# Altium PCB JTAG_Adapter.PcbDoc
Units mm, origin at the board's own origin, x right, y up, seen from the top; angles counter-clockwise.
Board outline 23.45 x 20.3 mm, 2 copper layers (Top Layer, Bottom Layer), stack 1.536 mm thick; 2 components, 7 nets, 20 pads, 0 vias.
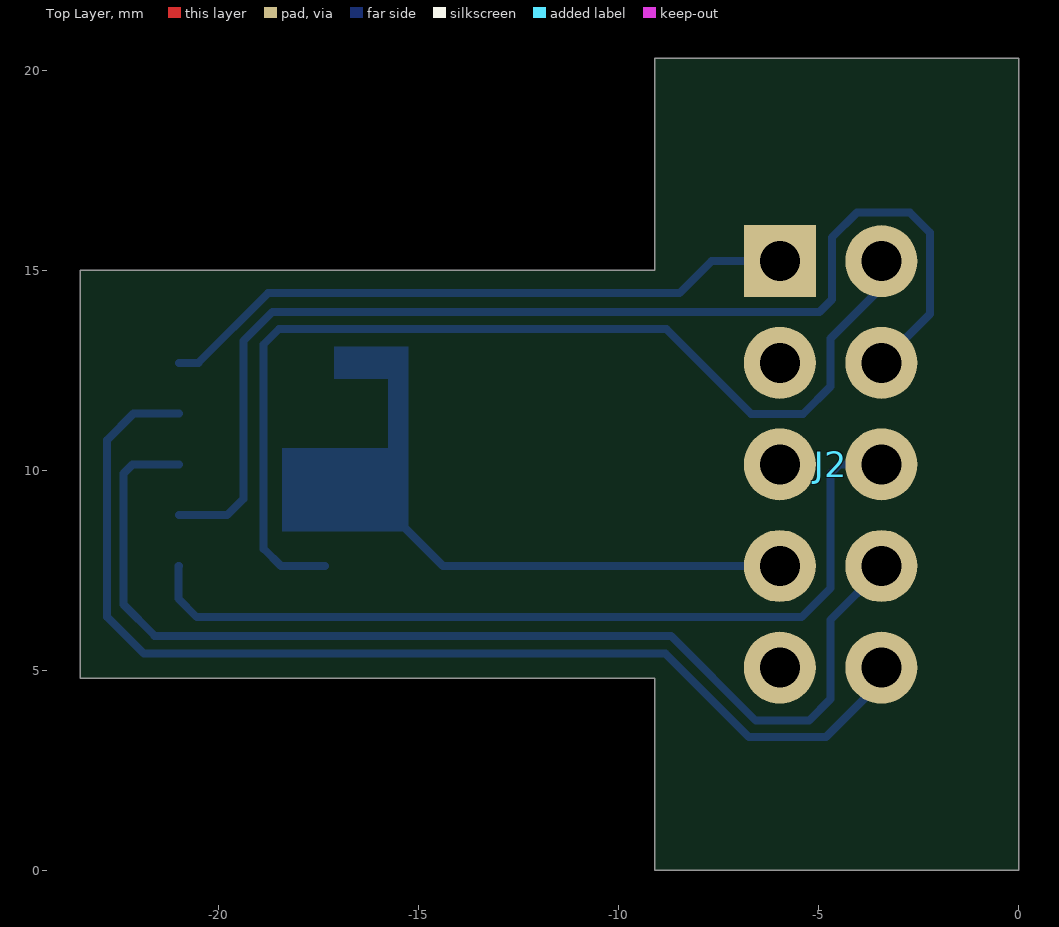
[diagram p0: Top Layer view]
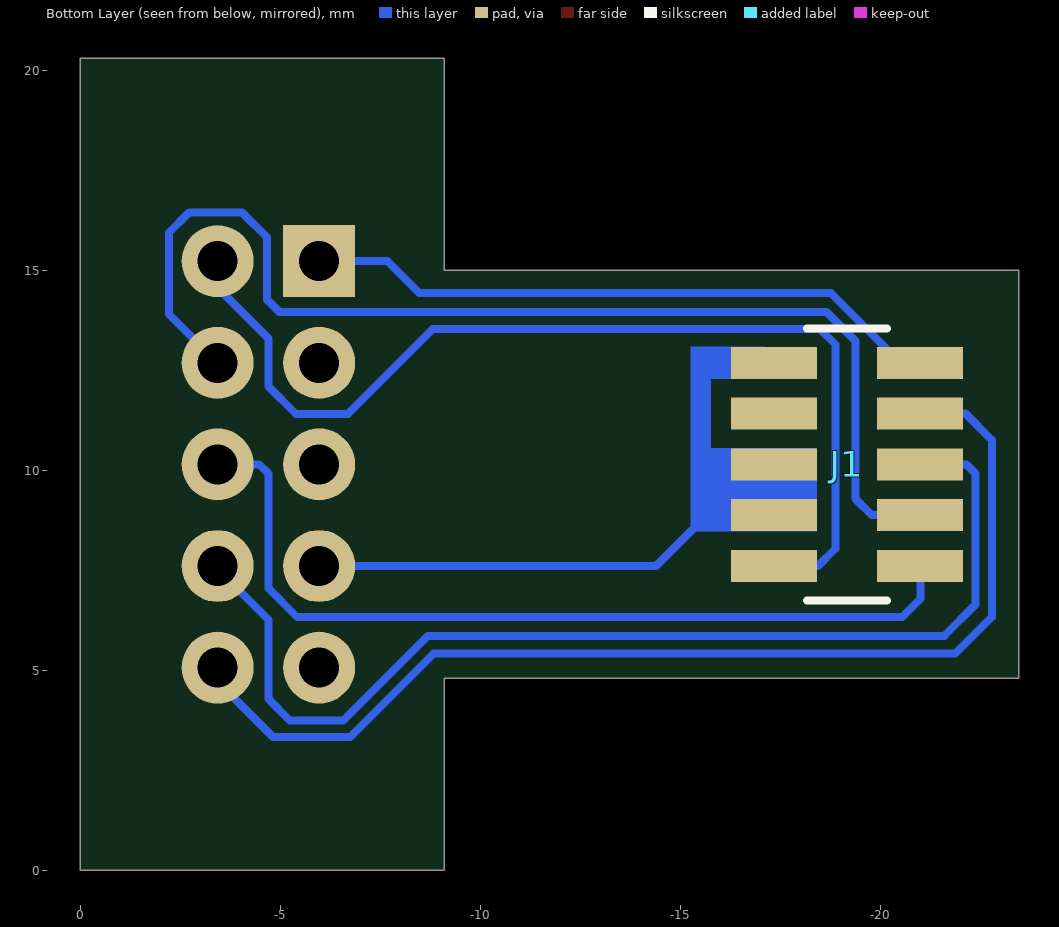
[diagram p1: Bottom Layer view, seen from below]

## Layer stack, top to bottom
Top Solder: solder mask 0.0102, Solder Resist, Dk 3.5
Top Layer: signal copper 0.018
Dielectric 1: dielectric 1.5, FR-4, Dk 4.8
Bottom Layer: signal copper 0.018
Bottom Solder: solder mask 0.0102, Solder Resist, Dk 3.5

## Board outline
-9.101,0 0,0 0,20.3 -9.101,20.3 -9.101,15.009 -23.454,15.009 -23.454,4.807 -9.101,4.807 -9.101,4.282

## Design rules (kind name [scope] priority, off if disabled: settings)
Clearance [All] p1: gap=0.2 ignorepadtopadclearanceinfootprint=FALSE
PolygonConnect [All] p1: connectstyle=Relief reliefconductorwidth=0.254 reliefentries=4 polygonreliefangle="90 Angle" airgapwidth=0.254
RoutingVias [All] p1: holewidth=1 width=1.8 viastyle="Through Hole" minholewidth=1 minwidth=1.8 maxholewidth=1 maxwidth=1.8
SolderMaskExpansion [All] p1: expansion=0.102
Width [All] p1: maxlimit=0.2 minlimit=0.2 preferedwidth=0.2
30 further rules are at their usual default settings.

## Components (designator, comment, footprint, x,y, rotation, side; value= is the part's Value field where it differs from the comment)
J1 "DS1065-05-2x5S8BS" DS1065-05-2x5S8BS -19.159,10.15 r90 bottom locked
J2 "BH-10" IDC-10-2.54 -4.7,10.15 r0 top

## Footprints (in the part's own frame and the unit in brackets; to place one, negate y for a bottom-side part, rotate by r counter-clockwise, add the part's x,y. Pads: shape width x height; smd on the part's side, far side on the other; paste and mask are expansions set on the pad)
DS1065-05-2x5S8BS [mm]
  rect 0.8x2.15 smd: 1(-2.54,-1.825) 2(-2.54,1.825) 3(-1.27,-1.825) 4(-1.27,1.825) 5(0,-1.825) 6(0,1.825) 7(1.27,-1.825) 8(1.27,1.825) 9(2.54,-1.825) 10(2.54,1.825)
  silkscreen extent -3.4,-1 3.4,1, body extent -3.35,-2.4 3.35,2.4, height 4.55
IDC-10-2.54 [mm]
  rect 1.8x1.8 hole 1: 1(-1.27,5.08)
  round 1.8 hole 1: 2(1.27,5.08) 3(-1.27,2.54) 4(1.27,2.54) 5(-1.27,0) 6(1.27,0) 7(-1.27,-2.54) 8(1.27,-2.54) 9(-1.27,-5.08) 10(1.27,-5.08)
  body extent -4.4,-10.15 4.7,10.15, height 9.3

## Part data
J1: System=Connector

## Nets (pads, with @x,y where several pads share a name; then routed paths per layer and width w, separated by ;. In a path a pad name is that pad's centre, name@x,y a point inside that pad or via, vN(x,y) a via of type N, cw(c..) or ccw(c..) an arc to the next point about the centre after c; other vN are vias at no path point)
DVDD: J1.2 J2.2 | length 26
  Bottom Layer w0.2: J1.2 -18.441,7.61 -18.872,8.041 -18.872,13.152 -18.493,13.531 -8.804,13.531 -6.688,11.415 -5.384,11.415 -4.701,12.098 -4.701,13.299 -3.43,14.57 J2.2
GND: J1.4 J1.6 J1.10 J2.7 | length 10.4
  Bottom Layer w0.2: -15.763,8.984 -14.389,7.61 J2.7
JTCK: J1.3 J2.4 | length 29.1
  Bottom Layer w0.2: J1.3 -19.788,8.88 -19.381,9.286 -19.381,13.234 -18.656,13.959 -4.977,13.959 -4.663,14.273 -4.663,15.827 -4.041,16.449 -2.719,16.449 -2.211,15.941 -2.211,13.909 J2.4
JTDI: J1.7 J2.10 | length 28
  Bottom Layer w0.2: J1.7 -22.124,11.42 -22.785,10.76 -22.785,6.336 -21.866,5.417 -8.826,5.417 -6.744,3.335 -4.816,3.335 -3.43,4.721 J2.10
JTDO: J1.5 J2.8 | length 28.4
  Bottom Layer w0.2: J1.5 -22.15,10.15 -22.378,9.921 -22.378,6.646 -21.597,5.865 -8.69,5.865 -6.568,3.743 -5.24,3.743 -4.7,4.283 -4.7,6.264 J2.8@-3.43,7.534 ; J2.8@-3.43,6.848 J2.8@-3.43,7.534 ; J2.8 J2.8@-3.43,7.534
JTMS: J1.1 J2.6 | length 21.9
  Bottom Layer w0.2: J1.1 -21.007,7.61 -21.007,6.795 -20.543,6.331 -5.423,6.331 -4.7,7.054 -4.7,9.921 -4.471,10.15 J2.6
JTRST: J1.9 J2.1 | length 16.1
  Bottom Layer w0.2: J1.9 -20.506,12.69 -18.767,14.429 -8.476,14.429 -7.675,15.23 J2.1
pads on no net: J1.8 J2.3 J2.5 J2.9

## Other copper
Bottom Layer:
  region net GND: -15.259,13.09 -17.106,13.09 -17.106,12.29 -15.55,12.29
  region net GND: -15.259,13.09 -15.759,13.09 -15.759,10.383 -15.259,10.383
  region net GND: -15.259,10.55
  region net GND: -18.409,10.55 -18.409,8.48 -15.259,8.48 -15.259,10.55

## Silkscreen, mask and mechanical layers (free items; w line width, h text height)
Mechanical 3:
  the board outline again, w0.2